# EAGLE board untitled (EAGLE 9.6.1)
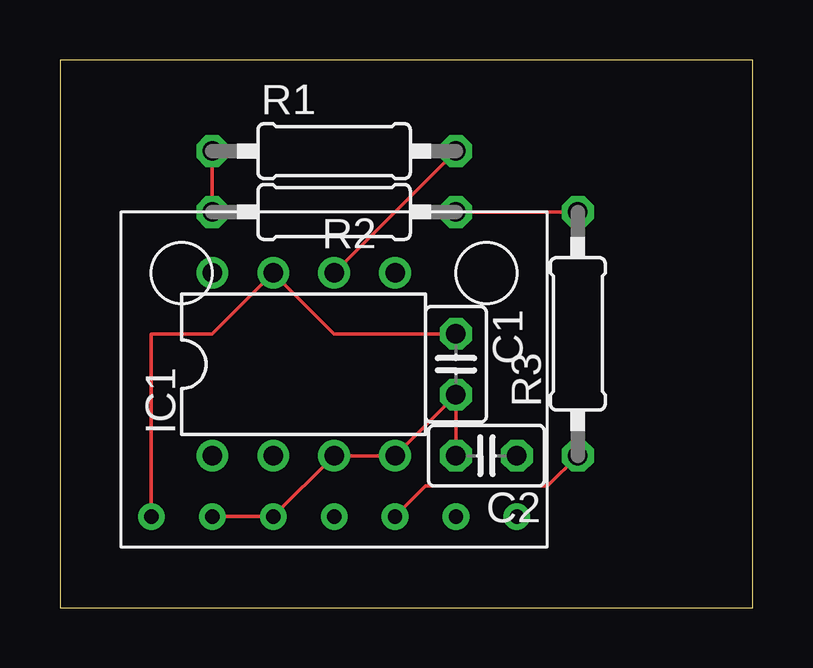
[diagram p0: board, top side]
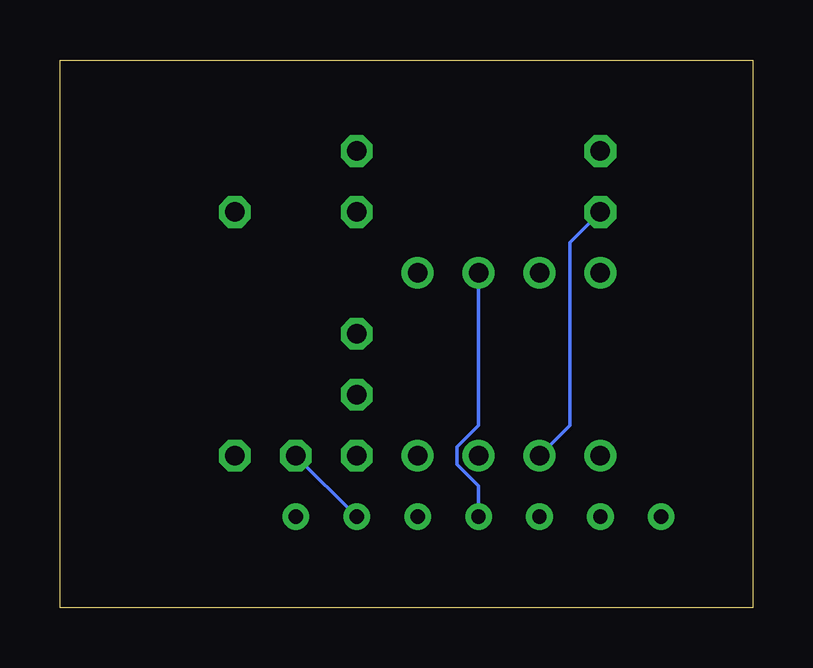
[diagram p1: board, bottom side, seen from below]

Size 28.88 x 22.85 mm. Coordinates in mm from the lower left corner, seen from the top.
Outline: 0,0 28.88,0 28.88,22.85 0,22.85 0,0
Copper layers (1*16): Top 0.035mm / dielectric 1.5mm / Bottom 0.035mm
Design rules "default": minimum track width 6mil, minimum drill 0.35mm, track to track 6mil, track to pad 6mil, pad to pad 6mil, via to via 6mil, smd to smd 6mil, copper to edge 40mil, drill to drill 6mil, minimum pad ring 10mil, minimum via ring 8mil, stop-mask expansion 4mil, vias tented up to drill 0mil, thermal gap 10mil

## Footprints (pad centres in the part's own frame; a part is rotated, then mirrored left to right if it is on the bottom)
C025-025X050 = drill 0.813 octagon: 1 -1.27,0; 2 1.27,0
DIL08 = drill 0.813 pad 1.27: 1 -3.81,-3.81; 2 -1.27,-3.81; 3 1.27,-3.81; 4 3.81,-3.81; 5 3.81,3.81; 6 1.27,3.81; 7 -1.27,3.81; 8 -3.81,3.81
0207/10 = drill 0.813 octagon: 1 -5.08,0; 2 5.08,0
LTC1966_MODULE = drill 0.6: P$1 -15.24,7.62; P$2 -15.24,5.08; P$3 -15.24,2.54; P$4 -15.24,0; P$5 -15.24,-2.54; P$6 -15.24,-5.08; P$7 -15.24,-7.62

## Placement (x,y rotation side)
C1  100n  [C025-025X050]  16.51,10.16 270 top
C2  1u  [C025-025X050]  17.78,6.35 180 top
IC1  UA741P  [DIL08]  10.16,10.16 0 top
R1  81k  [0207/10]  11.43,19.05 0 top
R2  33k  [0207/10]  11.43,16.51 180 top
R3  39  [0207/10]  21.59,11.43 90 top
U$1  LTC1966_MODULE  [LTC1966_MODULE]  11.43,19.05 90 top

## Library data of the parts
C1 C2 = rcl; SPICEPREFIX: C
IC1 = linear; SPICEPREFIX: X
R1-R3 = rcl; SPICEPREFIX: R
U$1 = net_modules

## Nets
+5V: C1.1 IC1.7 U$1.P$1
GND: C1.2 C2.2 IC1.3 IC1.4 U$1.P$2 U$1.P$3
N$1: IC1.2 R1.1 R2.2
N$2: IC1.6 R1.2 U$1.P$4
N$3: R3.1 U$1.P$5
N$4: R2.1 R3.2
N$5: C2.1 U$1.P$6

## Tracks (layer width: path | path; a pad name or v marks a point on that pad's centre or on a via)
+5V
  Top 0.152: C1.1 11.43,11.43 IC1.7 6.35,11.43 3.81,11.43 U$1.P$1
GND
  Top 0.152: U$1.P$2 U$1.P$3 IC1.3 IC1.4 C1.2 C2.2
N$1
  Top 0.152: R1.1 R2.2
  Bottom 0.152: R2.2 7.62,15.24 7.62,7.62 IC1.2
N$2
  Top 0.152: R1.2 IC1.6
  Bottom 0.152: IC1.6 11.43,7.61 12.32,6.72 12.32,5.98 11.43,5.09 U$1.P$4
N$3
  Top 0.152: U$1.P$5 15.24,5.08 20.32,5.08 R3.1
N$4
  Top 0.152: R2.1 R3.2
N$5
  Bottom 0.152: U$1.P$6 C2.1